# Altium PCB AVR精简学习板_加粗.PCBDOC (part 1 of 2)
Units mm, origin at the board's own origin, x right, y up, seen from the top; angles counter-clockwise.
Board outline 152.4 x 101.6 mm, 2 copper layers (Top Layer, Bottom Layer); 44 components, 51 nets, 211 pads, 1 vias.
Unrouted connection lines stored in the file: 1.
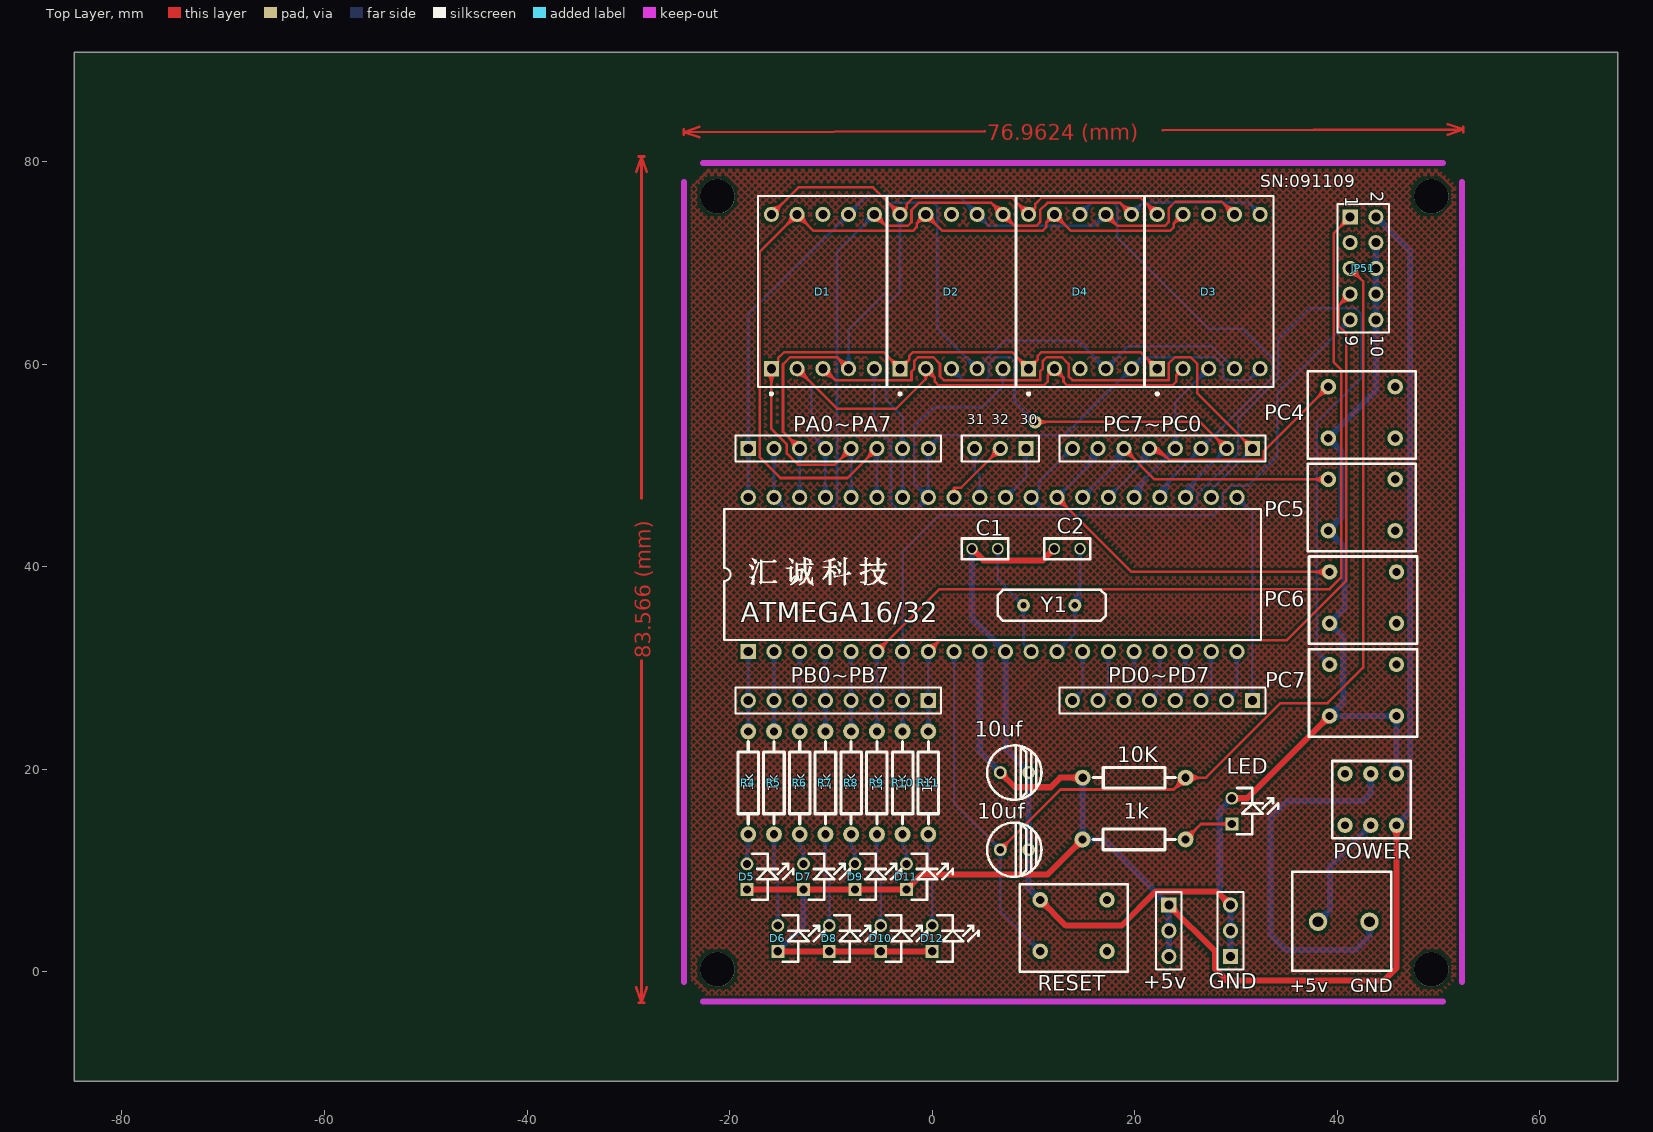
[diagram p0: Top Layer view]
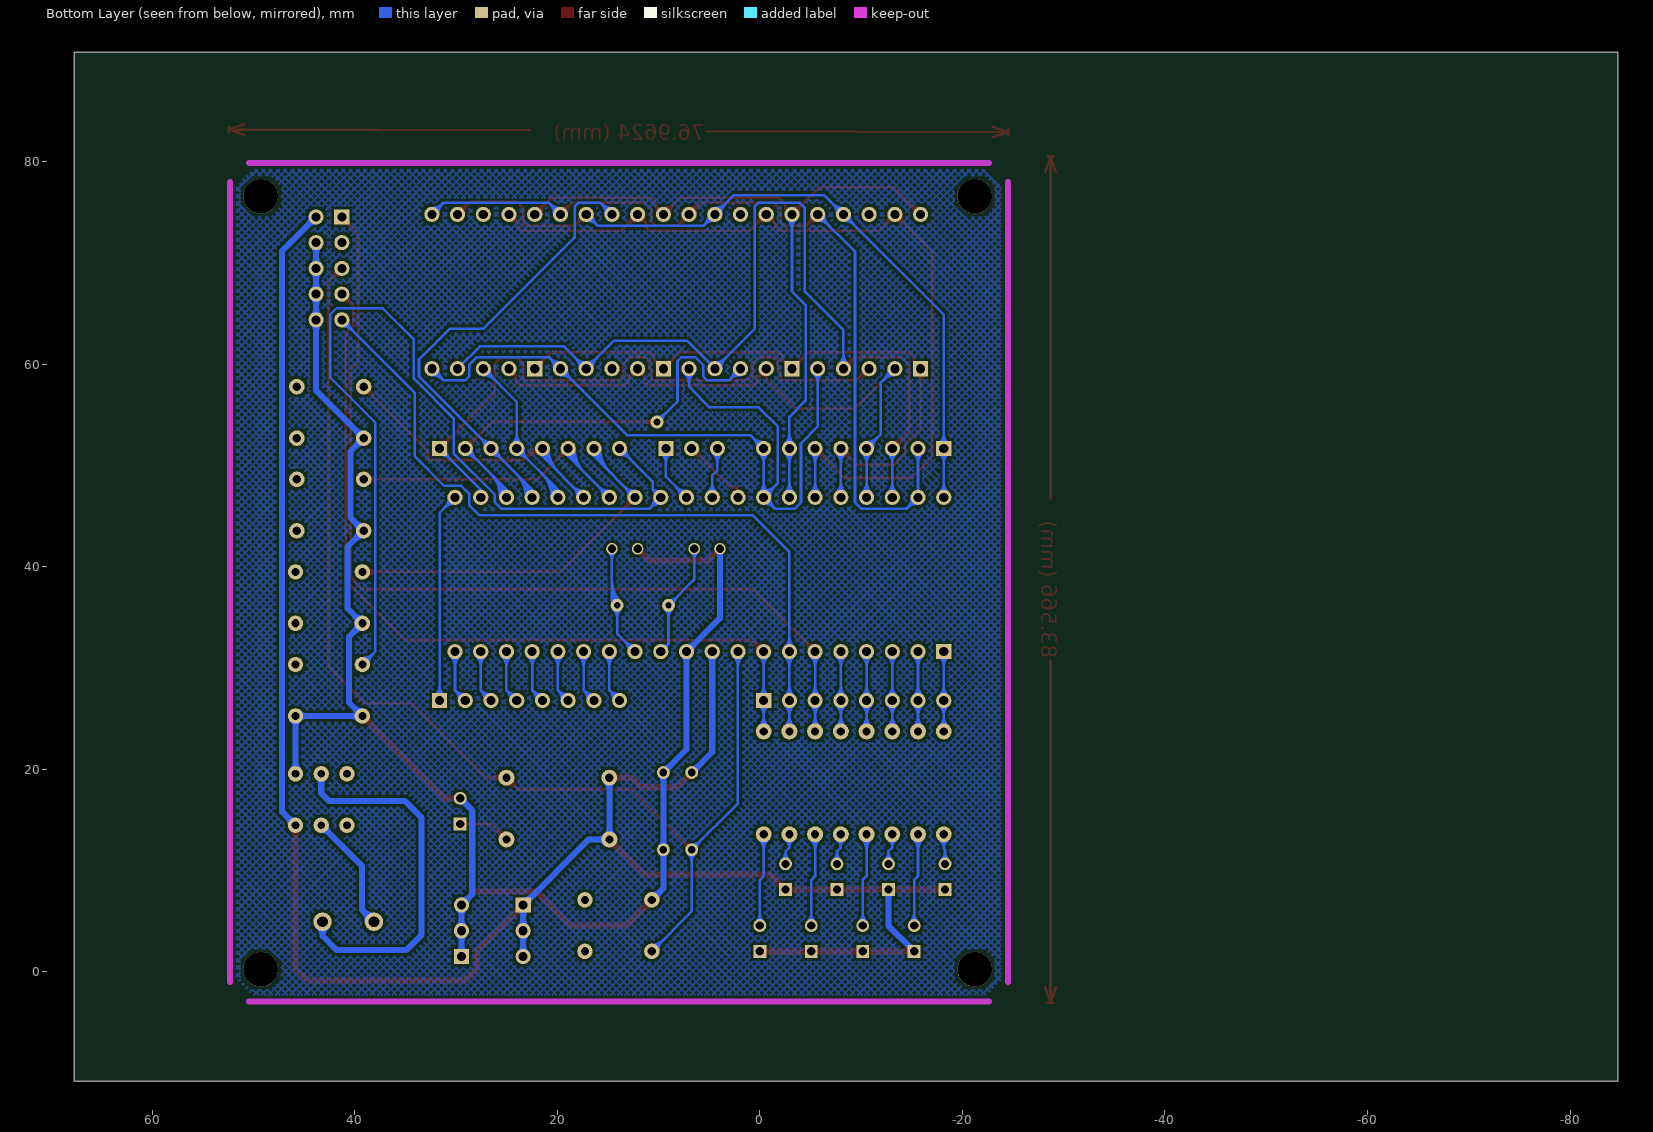
[diagram p1: Bottom Layer view, seen from below]

## Layer stack, top to bottom
Top Layer: signal copper 0.0356
Dielectric: dielectric 0.32, FR-4, Dk 4.8
Bottom Layer: signal copper 0.0356

## Board outline
-84.709,-10.795 67.691,-10.795 67.691,90.805 -84.709,90.805

## Design rules (kind name [scope] priority, off if disabled: settings)
Clearance [All] p1: gap=0.254
ComponentClearance [All] p1: gap=0.254 collisioncheckmode=0 verticalgap=0.254
PolygonConnect [All] p1: connectstyle=Relief reliefconductorwidth=0.254 reliefentries=4 polygonreliefangle="90 Angle"
RoutingVias [All] p1: holewidth=0.711 width=1.27 viastyle="Through Hole" minholewidth=0.711 minwidth=1.27 maxholewidth=0.711 maxwidth=1.27
SolderMaskExpansion [All] p1: expansion=0.102
TestPointUsage [All] p1: valid=0 allowmultiple=FALSE
Testpoint [All] p1: side=15 testpointundercomponent=TRUE minsize=1.016 maxsize=2.54 preferedsize=1.524 minholesize=0 maxholesize=1.016 preferedholesize=0.813 testpointgrid=0.025 style=1023 order=0-112345678
Width Width_3 [InNet('Net11_1')] p1: maxlimit=0.6 minlimit=0.6 preferedwidth=0.6
Width Width_2 [InNet('VCC')] p2: maxlimit=0.6 minlimit=0.6 preferedwidth=0.6
Width Width_1 [InNet('GND')] p3: maxlimit=0.6 minlimit=0.6 preferedwidth=0.6
Width [All] p4: maxlimit=0.254 minlimit=0.254 preferedwidth=0.254
17 further rules are at their usual default settings.

## Classes and differential pairs
component class shumaguan: 10uf 10Uf C1 C2 D1 D2 D3 D4 D5 D6 D7 D8 D9 D10 D11 D12 PC4 PC6 PC7 POWER RESET

## Components (designator, comment, footprint, x,y, rotation, side; value= is the part's Value field where it differs from the comment)
1k "470" AXIAL0.4 14.859,13.081 r0 top (schematic designator R1)
10K "8.2k" AXIAL0.4 25.019,19.177 r180 top (schematic designator R3)
10uf "360u\15v" cap2 2.159,19.685 r0 top (schematic designator C7)
10uf "1uf" cap2 2.159,12.065 r0 top (schematic designator C?)
+5v "VCC" HDR1X3 23.368,6.604 r270 top (schematic designator JP11)
ATMEGA16/32 "ATmega16-16PC" 40P6 5.969,39.243 r0 top (schematic designator U1)
C1 "15p" RAD0.3 6.985,41.783 r180 top
C2 "15p" RAD0.3 11.557,41.783 r0 top
D1 "3" LEDDIP-10/C15.24 -10.795,67.183 r0 top
D2 "Dpy Blue-CC" LEDDIP-10/C15.24 1.905,67.183 r0 top
D3 "Dpy Blue-CC" LEDDIP-10/C15.24 27.305,67.183 r0 top
D4 "Dpy Blue-CC" LEDDIP-10/C15.24 14.605,67.183 r0 top
D5 "LED" LED -17.78,10.16 r270 top
D6 "LED" LED -14.732,4.064 r270 top
D7 "LED" LED -12.192,10.16 r270 top
D8 "LED" LED -9.652,4.064 r270 top
D9 "LED" LED -7.112,10.16 r270 top
D10 "LED" LED -4.572,4.064 r270 top
D11 "LED" LED -2.032,10.16 r270 top
D12 "LED" LED 0.508,4.064 r270 top
GND "GND" HDR1X3 29.464,1.524 r90 top (schematic designator JP12)
JP1 "Header 3" HDR1X3 9.271,51.689 r180 top
JP51 "download" HDR2X5 41.275,74.549 r270 top
LED "LED" LED 30.099,16.637 r270 top
PA0~PA7 "Header 8" HDR1X8 -18.161,51.689 r0 top (schematic designator JP5)
PB0~PB7 "Header 8" HDR1X8 -0.381,26.797 r180 top (schematic designator JP2)
PC4 "KEY" KEY-1 39.116,57.785 r0 top (schematic designator 1)
PC5 "2" KEY-1 39.116,48.641 r0 top (schematic designator 2)
PC6 "KEY" KEY-1 39.243,39.497 r0 top (schematic designator 3)
PC7 "KEY" KEY-1 39.243,30.353 r0 top (schematic designator 4)
PC7~PC0 "Header 8" HDR1X8 31.623,51.689 r180 top (schematic designator JP6)
PD0~PD7 "Header 8" HDR1X8 31.623,26.797 r180 top (schematic designator JP3)
POWER "power" PCBComponent_1 42.672,5.588 r0 top (schematic designator 11)
R4 "470" AXIAL0.4 -18.161,13.589 r90 top
R5 "8.2k" AXIAL0.4 -15.621,13.589 r90 top
R6 "8.2k" AXIAL0.4 -13.081,13.589 r90 top
R7 "8.2k" AXIAL0.4 -10.541,13.589 r90 top
R8 "8.2k" AXIAL0.4 -8.001,13.589 r90 top
R9 "8.2k" AXIAL0.4 -5.461,13.589 r90 top
R10 "8.2k" AXIAL0.4 -2.921,13.589 r90 top
R11 "8.2k" AXIAL0.4 -0.381,13.589 r90 top
RESET "KEY" KEY-1 10.668,7.112 r0 top (schematic designator 5)
RT "KEY-33" key 43.307,20.193 r90 top
Y1 "12M" CRYSTAL 11.557,35.179 r180 top

## Footprints (in the part's own frame and the unit in brackets; to place one, negate y for a bottom-side part, rotate by r counter-clockwise, add the part's x,y. Pads: shape width x height; smd on the part's side, far side on the other; paste and mask are expansions set on the pad)
40P6 [mm] "DIP; 40 Leads; Row Spacing 15.24 mm; Pitch 2.54 mm"
  rect 1.5x1.5 hole 0.9: 1(-24.13,-7.62)
  round 1.5 hole 0.9: 2(-21.59,-7.62) 3(-19.05,-7.62) 4(-16.51,-7.62) 5(-13.97,-7.62) 6(-11.43,-7.62) 7(-8.89,-7.62) 8(-6.35,-7.62) 9(-3.81,-7.62) 10(-1.27,-7.62) 11(1.27,-7.62) 12(3.81,-7.62) 13(6.35,-7.62) 14(8.89,-7.62) 15(11.43,-7.62) 16(13.97,-7.62) 17(16.51,-7.62) 18(19.05,-7.62) 19(21.59,-7.62) 20(24.13,-7.62) 21(24.13,7.62) 22(21.59,7.62) 23(19.05,7.62) 24(16.51,7.62) 25(13.97,7.62) 26(11.43,7.62) 27(8.89,7.62) 28(6.35,7.62) 29(3.81,7.62) 30(1.27,7.62) 31(-1.27,7.62) 32(-3.81,7.62) 33(-6.35,7.62) 34(-8.89,7.62) 35(-11.43,7.62) 36(-13.97,7.62) 37(-16.51,7.62) 38(-19.05,7.62) 39(-21.59,7.62) 40(-24.13,7.62)
  silkscreen extent -26.5,-6.45 26.5,6.45
AXIAL0.4 [mil]
  round 62 hole 32: 1(-0.15,-0.04) 2(399.85,-0.04)
  silkscreen extent 40,-40 360,40
cap2 [mil]
  round 50 hole 30: 1(180,0) 2(290,0)
  silkscreen extent 129,-106 340,106
CRYSTAL [mil] "CRYSTAL"
  round 50 hole 25: 1(-100,-40) 2(100,-40)
  silkscreen extent -220,-100 200,20
HDR1X3 [mm] "Connector; Header; 3 Position"
  rect 1.5x1.5 hole 0.9: 1(0,0)
  round 1.5 hole 0.9: 2(2.54,0) 3(5.08,0)
  silkscreen extent -1.27,-1.27 6.35,1.27
HDR1X8 [mm] "Connector; Header; 8 Position"
  rect 1.5x1.5 hole 0.9: 1(0,0)
  round 1.5 hole 0.9: 2(2.54,0) 3(5.08,0) 4(7.62,0) 5(10.16,0) 6(12.7,0) 7(15.24,0) 8(17.78,0)
  silkscreen extent -1.27,-1.27 19.05,1.27
HDR2X5 [mm] "Connector; Header; 5x2 Position"
  rect 1.5x1.5 hole 0.9: 1(0,0)
  round 1.5 hole 0.9: 2(0,2.54) 3(2.54,0) 4(2.54,2.54) 5(5.08,0) 6(5.08,2.54) 7(7.62,0) 8(7.62,2.54) 9(10.16,0) 10(10.16,2.54)
  silkscreen extent -1.27,-1.27 11.43,3.81
key [mil]
  round 60 hole 30: 0(-225,100) 1(-225,0) 2(-225,-100) 3(-25,-100) 4(-25,0) 5(-25,100)
  silkscreen extent -275,-155 25,150
KEY-1 [mil] "KEY"
  round 60 hole 32: 0(0,0) 1(260,0) 2(0,-200) 3(260,-200)
  silkscreen extent -80,-280 340,60
LED [mil]
  rect 50x50 hole 32: 1(80,-20)
  round 50 hole 32: 2(-20,-20)
  silkscreen extent -60,0 120,160
LEDDIP-10/C15.24 [mm]
  rect 1.5x1.5 hole 0.9: 1(-5.08,-7.62)
  round 1.5 hole 0.9: 2(-2.54,-7.62) 3(0,-7.62) 4(2.54,-7.62) 5(5.08,-7.62) 6(5.08,7.62) 7(2.54,7.62) 8(0,7.62) 9(-2.54,7.62) 10(-5.08,7.62)
  silkscreen extent -6.4,-10.22 6.4,9.45
PCBComponent_1 [mil]
  round 71.81 hole 41.81: 1(-180,-25) 2(20,-25)
  silkscreen extent -280,-215 105,170
RAD0.3 [mil]
  round 45 hole 32: 1(20,0) 2(120,0)
  silkscreen extent -20,-40 160,40

## Part data
1k 10K R4 R5 R6 R7 R8 R9 R10 R11: library part RES2
10uf 10uf: library part "CAPACITOR POL", "Capacitor"
+5v GND: library part "Header 3", "Header, 3-Pin"
ATMEGA16/32: "8-Bit AVR Microcontroller with 16K Bytes of In-System Programmable Flash Memory"
C1 C2: library part CAP, "Capacitor"
D1: library part "Dpy Blue-CC", "14.2 mm General Purpose Blue 7-Segment Display: CC, RH DP, Gray Surface"
D2 D3 D4: "14.2 mm General Purpose Blue 7-Segment Display: CC, RH DP, Gray Surface"
JP1: "Header, 3-Pin"
JP51: library part "Header 5X2", "Header, 5-Pin, Dual row"
PA0~PA7 PB0~PB7 PC7~PC0 PD0~PD7: "Header, 8-Pin"
PC5: library part KEY, "KEY"
Y1: library part CRYSTAL, "Crystal"

## Free pads (board coordinates)
  round 3.4 hole 3.4: 0(-21.209,0.254) 0(-21.209,76.581) 0(49.276,0.254) 0(49.276,76.581)

## Via types
v1: diameter 1.27, hole 0.711, Top Layer to Bottom Layer, 1 vias

## Nets (pads, with @x,y where several pads share a name; then routed paths per layer and width w, separated by ;. In a path a pad name is that pad's centre, name@x,y a point inside that pad or via, vN(x,y) a via of type N, cw(c..) or ccw(c..) an arc to the next point about the centre after c; other vN are vias at no path point)
D0: ATMEGA16/32.40 D1.7 D2.7 D3.7 D4.7 PA0~PA7.1 | length 113.1
  Top Layer w0.254: D4.7@17.145,74.18 cw(c17.145,72.676) 18.209,73.739 cw(c19.272,74.803) D4.7@17.768,74.803 ; D4.7@17.145,74.434 cw(c17.145,73.543) 17.775,74.173 cw(c18.405,74.803) D4.7@17.514,74.803 ; D4.7@17.145,74.803 18.276,73.672 22.987,73.672 23.356,74.041 23.356,75.401 24.003,76.048 28.6,76.048 D3.7@29.845,74.803 ; D3.7@29.222,74.803 ccw(c27.718,74.803) 28.781,75.867 ccw(c29.845,76.93) D3.7@29.845,75.426 ; D3.7@29.476,74.803 ccw(c28.585,74.803) 29.215,75.433 ccw(c29.845,76.063) D3.7@29.845,75.172
  Bottom Layer w0.254: ATMEGA16/32.40@-18.602,47.304 ccw(c-19.665,48.367) -18.161,48.367 ccw(c-16.657,48.367) ATMEGA16/32.40@-17.72,47.304 ; PA0~PA7.1@-18.602,51.248 cw(c-19.665,50.185) -18.161,50.185 cw(c-16.657,50.185) PA0~PA7.1@-17.72,51.248 ; PA0~PA7.1@-18.602,52.13 ccw(c-19.665,53.193) -18.161,53.193 ccw(c-16.657,53.193) PA0~PA7.1@-17.72,52.13 ; ATMEGA16/32.40@-18.422,47.124 ccw(c-19.052,47.754) -18.161,47.754 ccw(c-17.27,47.754) ATMEGA16/32.40@-17.9,47.124 ; PA0~PA7.1@-18.422,51.428 cw(c-19.052,50.798) -18.161,50.798 cw(c-17.27,50.798) PA0~PA7.1@-17.9,51.428 ; PA0~PA7.1@-18.422,51.95 ccw(c-19.052,52.58) -18.161,52.58 ccw(c-17.27,52.58) PA0~PA7.1@-17.9,51.95 ; ATMEGA16/32.40@-18.161,46.863 PA0~PA7.1@-18.161,51.689 -18.161,64.897 D1.7@-8.255,74.803 -6.35,76.708 2.54,76.708 D2.7@4.445,74.803 5.588,73.66 16.002,73.66 D4.7@17.145,74.803 ; D1.7@-8.878,74.803 cw(c-10.382,74.803) -9.319,73.739 cw(c-8.255,72.676) D1.7@-8.255,74.18 ; D1.7@-8.624,74.803 cw(c-9.515,74.803) -8.885,74.173 cw(c-8.255,73.543) D1.7@-8.255,74.434 ; D1.7@-8.255,75.172 ccw(c-8.255,76.063) -7.625,75.433 ccw(c-6.995,74.803) D1.7@-7.886,74.803 ; D1.7@-8.255,75.426 ccw(c-8.255,76.93) -7.191,75.867 ccw(c-6.128,74.803) D1.7@-7.632,74.803 ; D2.7@3.822,74.803 ccw(c2.318,74.803) 3.381,75.867 ccw(c4.445,76.93) D2.7@4.445,75.426 ; D2.7@4.076,74.803 ccw(c3.185,74.803) 3.815,75.433 ccw(c4.445,76.063) D2.7@4.445,75.172 ; D2.7@4.445,74.18 cw(c4.445,72.676) 5.509,73.739 cw(c6.572,74.803) D2.7@5.068,74.803 ; D2.7@4.445,74.434 cw(c4.445,73.543) 5.075,74.173 cw(c5.705,74.803) D2.7@4.814,74.803 ; D4.7@16.522,74.803 cw(c15.018,74.803) 16.081,73.739 cw(c17.145,72.676) D4.7@17.145,74.18 ; D4.7@16.776,74.803 cw(c15.885,74.803) 16.515,74.173 cw(c17.145,73.543) D4.7@17.145,74.434
D1: ATMEGA16/32.39 D1.6 D2.6 D3.6 D4.6 PA0~PA7.2 | length 119.8
  Top Layer w0.254: D1.6@-5.715,74.18 cw(c-5.715,72.676) -4.651,73.739 cw(c-3.588,74.803) D1.6@-5.092,74.803 ; D1.6@-5.715,74.434 cw(c-5.715,73.543) -5.085,74.173 cw(c-4.455,74.803) D1.6@-5.346,74.803 ; D1.6@-5.715,74.803 -4.584,73.672 -2.413,73.672 -2.044,74.041 -2.044,75.223 -1.333,75.934 5.854,75.934 D2.6@6.985,74.803 8.116,73.672 10.299,73.672 10.668,74.041 10.668,75.235 11.367,75.934 18.554,75.934 D4.6@19.685,74.803 ; D2.6@6.362,74.803 ccw(c4.858,74.803) 5.921,75.867 ccw(c6.985,76.93) D2.6@6.985,75.426 ; D2.6@6.616,74.803 ccw(c5.725,74.803) 6.355,75.433 ccw(c6.985,76.063) D2.6@6.985,75.172 ; D2.6@6.985,74.18 cw(c6.985,72.676) 8.049,73.739 cw(c9.112,74.803) D2.6@7.608,74.803 ; D2.6@6.985,74.434 cw(c6.985,73.543) 7.615,74.173 cw(c8.245,74.803) D2.6@7.354,74.803 ; D4.6@19.062,74.803 ccw(c17.558,74.803) 18.621,75.867 ccw(c19.685,76.93) D4.6@19.685,75.426 ; D4.6@19.316,74.803 ccw(c18.425,74.803) 19.055,75.433 ccw(c19.685,76.063) D4.6@19.685,75.172
  Bottom Layer w0.254: PA0~PA7.2@-16.062,51.248 cw(c-17.125,50.185) -15.621,50.185 cw(c-14.117,50.185) PA0~PA7.2@-15.18,51.248 ; PA0~PA7.2@-15.882,51.428 cw(c-16.512,50.798) -15.621,50.798 cw(c-14.73,50.798) PA0~PA7.2@-15.36,51.428 ; ATMEGA16/32.39@-15.621,46.24 cw(c-15.621,44.736) -14.557,45.799 cw(c-13.494,46.863) ATMEGA16/32.39@-14.998,46.863 ; ATMEGA16/32.39@-15.621,46.494 cw(c-15.621,45.603) -14.991,46.233 cw(c-14.361,46.863) ATMEGA16/32.39@-15.252,46.863 ; PA0~PA7.2@-15.621,51.689 ATMEGA16/32.39@-15.621,46.863 -14.478,45.72 -10.033,45.72 -9.398,46.355 -9.398,71.12 D1.6@-5.715,74.803 ; D1.6@-6.338,74.803 cw(c-7.842,74.803) -6.779,73.739 cw(c-5.715,72.676) D1.6@-5.715,74.18 ; D1.6@-6.084,74.803 cw(c-6.975,74.803) -6.345,74.173 cw(c-5.715,73.543) D1.6@-5.715,74.434 ; D4.6@19.685,74.803 20.828,75.946 31.242,75.946 D3.6@32.385,74.803 ; D4.6@19.685,75.172 ccw(c19.685,76.063) 20.315,75.433 ccw(c20.945,74.803) D4.6@20.054,74.803 ; D4.6@19.685,75.426 ccw(c19.685,76.93) 20.749,75.867 ccw(c21.812,74.803) D4.6@20.308,74.803 ; D3.6@31.762,74.803 ccw(c30.258,74.803) 31.321,75.867 ccw(c32.385,76.93) D3.6@32.385,75.426 ; D3.6@32.016,74.803 ccw(c31.125,74.803) 31.755,75.433 ccw(c32.385,76.063) D3.6@32.385,75.172
D2: ATMEGA16/32.38 D1.4 D2.4 D3.4 D4.4 PA0~PA7.3 | length 121.1
  Top Layer w0.254: PA0~PA7.3@-13.704,51.689 ccw(c-15.208,51.689) -14.145,52.753 ccw(c-13.081,53.816) PA0~PA7.3@-13.081,52.312 ; PA0~PA7.3@-13.45,51.689 ccw(c-14.341,51.689) -13.711,52.319 ccw(c-13.081,52.949) PA0~PA7.3@-13.081,52.058 ; PA0~PA7.3@-13.081,51.689 -14.732,53.34 -14.732,59.995 -14.033,60.694 -9.386,60.694 D1.4@-8.255,59.563 ; D1.4@-8.878,59.563 ccw(c-10.382,59.563) -9.319,60.627 ccw(c-8.255,61.69) D1.4@-8.255,60.186 ; D1.4@-8.624,59.563 ccw(c-9.515,59.563) -8.885,60.193 ccw(c-8.255,60.823) D1.4@-8.255,59.932
  Bottom Layer w0.254: ATMEGA16/32.38@-13.522,47.304 ccw(c-14.585,48.367) -13.081,48.367 ccw(c-11.577,48.367) ATMEGA16/32.38@-12.64,47.304 ; PA0~PA7.3@-13.522,51.248 cw(c-14.585,50.185) -13.081,50.185 cw(c-11.577,50.185) PA0~PA7.3@-12.64,51.248 ; ATMEGA16/32.38@-13.342,47.124 ccw(c-13.972,47.754) -13.081,47.754 ccw(c-12.19,47.754) ATMEGA16/32.38@-12.82,47.124 ; PA0~PA7.3@-13.342,51.428 cw(c-13.972,50.798) -13.081,50.798 cw(c-12.19,50.798) PA0~PA7.3@-12.82,51.428 ; ATMEGA16/32.38@-13.081,46.863 PA0~PA7.3@-13.081,51.689 ; D1.4@-8.696,60.004 ccw(c-9.759,61.067) -8.255,61.067 ccw(c-6.751,61.067) D1.4@-7.814,60.004 ; D1.4@-8.516,59.824 ccw(c-9.146,60.454) -8.255,60.454 ccw(c-7.364,60.454) D1.4@-7.994,59.824 ; D1.4@-8.255,59.563 -8.255,63.373 -4.445,67.183 -4.445,75.438 -3.937,75.946 0.127,75.946 0.508,75.565 0.508,63.5 D2.4@4.445,59.563 7.214,62.332 14.376,62.332 D4.4@17.145,59.563 19.355,61.773 27.635,61.773 D3.4@29.845,59.563 ; D2.4@3.822,59.563 ccw(c2.318,59.563) 3.381,60.627 ccw(c4.445,61.69) D2.4@4.445,60.186 ; D2.4@4.076,59.563 ccw(c3.185,59.563) 3.815,60.193 ccw(c4.445,60.823) D2.4@4.445,59.932 ; D4.4@16.522,59.563 ccw(c15.018,59.563) 16.081,60.627 ccw(c17.145,61.69) 17.145,60.186 ccw(c17.145,61.69) 18.209,60.627 ccw(c19.272,59.563) D4.4@17.768,59.563 ; D4.4@16.776,59.563 ccw(c15.885,59.563) 16.515,60.193 ccw(c17.145,60.823) 17.145,59.932 ccw(c17.145,60.823) 17.775,60.193 ccw(c18.405,59.563) D4.4@17.514,59.563
D3: ATMEGA16/32.37 D1.2 D2.2 D3.2 D4.2 PA0~PA7.4 | length 87.3
  Top Layer w0.254: D1.2@-13.335,58.94 cw(c-13.335,57.436) -12.271,58.499 cw(c-11.208,59.563) D1.2@-12.712,59.563 ; D1.2@-13.335,59.194 cw(c-13.335,58.303) -12.705,58.933 cw(c-12.075,59.563) D1.2@-12.966,59.563 ; D1.2@-13.335,59.563 -9.398,55.626 -3.548,55.626 -0.635,58.539 ; D2.2@-0.921,59.01 cw(c-1.164,58.539) -0.635,58.539 ; D2.2@-0.589,59.197 cw(c-0.517,58.614) -0.101,59.029 cw(c0.314,59.445) D2.2@-0.269,59.517 ; D2.2@-0.558,58.945 cw(c-0.435,57.961) 0.266,58.662 ; D2.2@-0.349,59.01 ccw(c-0.106,58.539) -0.635,58.539 ; D2.2@-0.017,59.486 ccw(c0.967,59.363) 0.266,58.662 ; D4.2@11.487,59.331 cw(c11.112,59.181) 11.398,58.896 cw(c11.683,58.61) D4.2@11.833,58.985 ; D4.2@12.111,59.197 cw(c12.183,58.614) 12.599,59.029 cw(c13.014,59.445) D4.2@12.431,59.517 ; D4.2@12.142,58.945 cw(c12.265,57.961) 12.966,58.662 ; D4.2@12.683,59.486 ccw(c13.667,59.363) 12.966,58.662 ; D3.2@24.187,59.331 cw(c23.812,59.181) 24.098,58.896 cw(c24.383,58.61) D3.2@24.533,58.985 ; D3.2@24.765,59.563 24.098,58.896 24.098,58.273 23.749,57.924 13.335,57.924 12.966,58.293 12.966,58.662 ; -0.635,58.539 D2.2@-0.635,59.563 0.266,58.662 ; 0.266,58.662 0.266,58.293 0.635,57.924 11.049,57.924 11.398,58.273 11.398,58.896 D4.2@12.065,59.563 12.966,58.662
  Bottom Layer w0.254: D1.2@-13.335,58.94 cw(c-13.335,57.436) -12.271,58.499 cw(c-11.208,59.563) D1.2@-12.712,59.563 ; D1.2@-13.335,59.194 cw(c-13.335,58.303) -12.705,58.933 cw(c-12.075,59.563) D1.2@-12.966,59.563 ; D1.2@-13.335,59.563 -11.938,58.166 -11.938,53.086 PA0~PA7.4@-10.541,51.689 ATMEGA16/32.37@-10.541,46.863 ; PA0~PA7.4@-11.164,51.689 ccw(c-12.668,51.689) -11.605,52.753 ccw(c-10.541,53.816) PA0~PA7.4@-10.541,52.312 ; ATMEGA16/32.37@-10.982,47.304 ccw(c-12.045,48.367) -10.541,48.367 ccw(c-9.037,48.367) ATMEGA16/32.37@-10.1,47.304 ; PA0~PA7.4@-10.982,51.248 cw(c-12.045,50.185) -10.541,50.185 cw(c-9.037,50.185) PA0~PA7.4@-10.1,51.248 ; PA0~PA7.4@-10.91,51.689 ccw(c-11.801,51.689) -11.171,52.319 ccw(c-10.541,52.949) PA0~PA7.4@-10.541,52.058 ; ATMEGA16/32.37@-10.802,47.124 ccw(c-11.432,47.754) -10.541,47.754 ccw(c-9.65,47.754) ATMEGA16/32.37@-10.28,47.124 ; PA0~PA7.4@-10.802,51.428 cw(c-11.432,50.798) -10.541,50.798 cw(c-9.65,50.798) PA0~PA7.4@-10.28,51.428
D4: ATMEGA16/32.36 D1.1 D2.1 D3.1 D4.1 PA0~PA7.5 | length 97.1
  Top Layer w0.254: D1.1@-16.316,59.122 cw(c-17.379,58.059) -15.875,58.059 cw(c-14.371,58.059) D1.1@-15.434,59.122 ; D1.1@-16.136,59.302 cw(c-16.766,58.672) -15.875,58.672 cw(c-14.984,58.672) D1.1@-15.614,59.302 ; D1.1@-15.643,60.141 ccw(c-15.493,60.516) -15.208,60.23 ccw(c-14.922,59.945) D1.1@-15.297,59.795 ; PA0~PA7.5@-8.624,51.689 cw(c-10.128,51.689) -9.065,50.625 cw(c-8.001,49.562) PA0~PA7.5@-8.001,51.066 ; PA0~PA7.5@-8.37,51.689 cw(c-9.261,51.689) -8.631,51.059 cw(c-8.001,50.429) PA0~PA7.5@-8.001,51.32 ; PA0~PA7.5@-8.001,51.689 -9.601,50.089 -13.259,50.089 -14.351,51.181 -14.351,52.095 -15.875,53.619 D1.1@-15.875,59.563 -15.208,60.23 -15.208,60.599 -14.605,61.202 -4.814,61.202 D2.1@-3.175,59.563 -2.274,60.464 ; D2.1@-3.798,59.563 ccw(c-5.302,59.563) -4.239,60.627 ccw(c-3.175,61.69) D2.1@-3.175,60.186 ; D2.1@-3.544,59.563 ccw(c-4.435,59.563) -3.805,60.193 ccw(c-3.175,60.823) D2.1@-3.175,59.932 ; D2.1@-3.129,59.929 ccw(c-3.057,60.512) -2.641,60.097 ccw(c-2.226,59.681) D2.1@-2.809,59.609 ; D2.1@-3.098,60.181 ccw(c-2.975,61.165) -2.274,60.464 ; D2.1@-2.557,59.64 cw(c-1.573,59.763) -2.274,60.464 ; D4.1@8.902,59.563 ccw(c7.398,59.563) 8.461,60.627 ccw(c9.525,61.69) D4.1@9.525,60.186 ; D4.1@9.156,59.563 ccw(c8.265,59.563) 8.895,60.193 ccw(c9.525,60.823) D4.1@9.525,59.932 ; D4.1@9.571,59.929 ccw(c9.643,60.512) 10.059,60.097 ccw(c10.474,59.681) D4.1@9.891,59.609 ; D4.1@9.602,60.181 ccw(c9.725,61.165) 10.426,60.464 ; D4.1@10.143,59.64 cw(c11.127,59.763) 10.426,60.464 ; D3.1@21.602,59.563 ccw(c20.098,59.563) 21.161,60.627 ccw(c22.225,61.69) D3.1@22.225,60.186 ; D3.1@21.856,59.563 ccw(c20.965,59.563) 21.595,60.193 ccw(c22.225,60.823) D3.1@22.225,59.932 ; D3.1@22.225,59.563 20.586,61.202 10.795,61.202 10.426,60.833 10.426,60.464 ; -2.274,60.464 -2.274,60.833 -1.905,61.202 7.886,61.202 D4.1@9.525,59.563 10.426,60.464
  Bottom Layer w0.254: ATMEGA16/32.36@-8.442,47.304 ccw(c-9.505,48.367) -8.001,48.367 ccw(c-6.497,48.367) ATMEGA16/32.36@-7.56,47.304 ; PA0~PA7.5@-8.442,51.248 cw(c-9.505,50.185) -8.001,50.185 cw(c-6.497,50.185) PA0~PA7.5@-7.56,51.248 ; ATMEGA16/32.36@-8.262,47.124 ccw(c-8.892,47.754) -8.001,47.754 ccw(c-7.11,47.754) ATMEGA16/32.36@-7.74,47.124 ; PA0~PA7.5@-8.262,51.428 cw(c-8.892,50.798) -8.001,50.798 cw(c-7.11,50.798) PA0~PA7.5@-7.74,51.428 ; ATMEGA16/32.36@-8.001,46.863 PA0~PA7.5@-8.001,51.689
D5: ATMEGA16/32.35 D1.9 D2.9 D3.9 D4.9 PA0~PA7.6 | length 120.4
  Top Layer w0.254: D1.9@-13.958,74.803 cw(c-15.462,74.803) -14.399,73.739 cw(c-13.335,72.676) -13.335,74.18 cw(c-13.335,72.676) -12.271,73.739 cw(c-11.208,74.803) D1.9@-12.712,74.803 ; D1.9@-13.704,74.803 cw(c-14.595,74.803) -13.965,74.173 cw(c-13.335,73.543) -13.335,74.434 cw(c-13.335,73.543) -12.705,74.173 cw(c-12.075,74.803) D1.9@-12.966,74.803 ; PA0~PA7.6@-6.084,51.689 cw(c-7.588,51.689) -6.525,50.625 cw(c-5.461,49.562) PA0~PA7.6@-5.461,51.066 ; PA0~PA7.6@-5.83,51.689 cw(c-6.721,51.689) -6.091,51.059 cw(c-5.461,50.429) PA0~PA7.6@-5.461,51.32 ; PA0~PA7.6@-5.461,51.689 -8.382,48.768 -14.986,48.768 -17.018,50.8 -17.018,71.12 D1.9@-13.335,74.803 -11.696,73.164 -1.905,73.164 -1.536,73.533 -1.536,73.902 ; D2.9@-1.253,74.726 cw(c-2.237,74.603) -1.536,73.902 ; D2.9@-1.001,74.757 cw(c-1.584,74.685) -1.169,74.269 cw(c-0.753,73.854) D2.9@-0.681,74.437 ; D2.9@-0.712,74.185 ccw(c-0.835,73.201) -1.536,73.902 ; D2.9@-0.635,74.18 cw(c-0.635,72.676) 0.429,73.739 cw(c1.492,74.803) D2.9@-0.012,74.803 ; D2.9@-0.635,74.434 cw(c-0.635,73.543) -0.005,74.173 cw(c0.625,74.803) D2.9@-0.266,74.803 ; D4.9@11.457,74.667 cw(c10.755,74.51) 11.264,74.002 ; D4.9@11.929,74.195 ccw(c11.772,73.493) 11.264,74.002 ; D4.9@12.065,74.18 cw(c12.065,72.676) 13.129,73.739 cw(c14.192,74.803) D4.9@12.688,74.803 ; D4.9@12.065,74.434 cw(c12.065,73.543) 12.695,74.173 cw(c13.325,74.803) D4.9@12.434,74.803 ; D3.9@24.147,74.726 cw(c23.163,74.603) 23.864,73.902 ; D3.9@24.399,74.757 cw(c23.816,74.685) 24.231,74.269 cw(c24.647,73.854) D3.9@24.719,74.437 ; D3.9@24.688,74.185 ccw(c24.565,73.201) 23.864,73.902 ; D3.9@24.765,74.803 23.864,73.902 ; -1.536,73.902 D2.9@-0.635,74.803 1.004,73.164 10.894,73.164 11.263,73.533 11.263,74.001 ; 11.263,74.001 D4.9@12.065,74.803 13.704,73.164 23.495,73.164 23.864,73.533 23.864,73.902
  Bottom Layer w0.254: ATMEGA16/32.35@-5.902,47.304 ccw(c-6.965,48.367) -5.461,48.367 ccw(c-3.957,48.367) ATMEGA16/32.35@-5.02,47.304 ; PA0~PA7.6@-5.902,51.248 cw(c-6.965,50.185) -5.461,50.185 cw(c-3.957,50.185) PA0~PA7.6@-5.02,51.248 ; ATMEGA16/32.35@-5.722,47.124 ccw(c-6.352,47.754) -5.461,47.754 ccw(c-4.57,47.754) ATMEGA16/32.35@-5.2,47.124 ; PA0~PA7.6@-5.722,51.428 cw(c-6.352,50.798) -5.461,50.798 cw(c-4.57,50.798) PA0~PA7.6@-5.2,51.428 ; ATMEGA16/32.35@-5.461,46.863 PA0~PA7.6@-5.461,51.689
D6: ATMEGA16/32.34 D1.10 D2.10 D3.10 D4.10 PA0~PA7.7 | length 104.6
  Top Layer w0.254: D1.10@-15.875,74.803 -13.208,77.47 -5.842,77.47 D2.10@-3.175,74.803 -2.508,75.47 -2.508,75.839 -1.905,76.442 7.886,76.442 D4.10@9.525,74.803 10.192,75.47 10.192,75.839 10.795,76.442 20.586,76.442 D3.10@22.225,74.803 ; D1.10@-15.875,75.172 ccw(c-15.875,76.063) -15.245,75.433 ccw(c-14.615,74.803) D1.10@-15.506,74.803 ; D1.10@-15.875,75.426 ccw(c-15.875,76.93) -14.811,75.867 ccw(c-13.748,74.803) D1.10@-15.252,74.803 ; D2.10@-3.798,74.803 ccw(c-5.302,74.803) -4.239,75.867 ccw(c-3.175,76.93) D2.10@-3.175,75.426 ; D2.10@-3.544,74.803 ccw(c-4.435,74.803) -3.805,75.433 ccw(c-3.175,76.063) D2.10@-3.175,75.172 ; D2.10@-2.943,75.381 ccw(c-2.793,75.756) -2.508,75.47 ccw(c-2.222,75.185) D2.10@-2.597,75.035 ; D4.10@8.902,74.803 ccw(c7.398,74.803) 8.461,75.867 ccw(c9.525,76.93) D4.10@9.525,75.426 ; D4.10@9.156,74.803 ccw(c8.265,74.803) 8.895,75.433 ccw(c9.525,76.063) D4.10@9.525,75.172 ; D4.10@9.757,75.381 ccw(c9.907,75.756) 10.192,75.47 ccw(c10.478,75.185) D4.10@10.103,75.035 ; D3.10@21.602,74.803 ccw(c20.098,74.803) 21.161,75.867 ccw(c22.225,76.93) D3.10@22.225,75.426 ; D3.10@21.856,74.803 ccw(c20.965,74.803) 21.595,75.433 ccw(c22.225,76.063) D3.10@22.225,75.172
  Bottom Layer w0.254: D2.10@-3.616,74.362 cw(c-4.679,73.299) -3.175,73.299 cw(c-1.671,73.299) D2.10@-2.734,74.362 ; D2.10@-3.436,74.542 cw(c-4.066,73.912) -3.175,73.912 cw(c-2.284,73.912) D2.10@-2.914,74.542 ; ATMEGA16/32.34@-3.362,47.304 ccw(c-4.425,48.367) -2.921,48.367 ccw(c-1.417,48.367) ATMEGA16/32.34@-2.48,47.304 ; PA0~PA7.7@-3.362,51.248 cw(c-4.425,50.185) -2.921,50.185 cw(c-1.417,50.185) PA0~PA7.7@-2.48,51.248 ; PA0~PA7.7@-3.362,52.13 ccw(c-4.425,53.193) -2.921,53.193 ccw(c-1.417,53.193) PA0~PA7.7@-2.48,52.13 ; ATMEGA16/32.34@-3.182,47.124 ccw(c-3.812,47.754) -2.921,47.754 ccw(c-2.03,47.754) ATMEGA16/32.34@-2.66,47.124 ; PA0~PA7.7@-3.182,51.428 cw(c-3.812,50.798) -2.921,50.798 cw(c-2.03,50.798) PA0~PA7.7@-2.66,51.428 ; PA0~PA7.7@-3.182,51.95 ccw(c-3.812,52.58) -2.921,52.58 ccw(c-2.03,52.58) PA0~PA7.7@-2.66,51.95 ; D2.10@-3.175,74.803 -3.175,67.183 -4.521,65.837 -4.521,56.413 -2.921,54.813 PA0~PA7.7@-2.921,51.689 ATMEGA16/32.34@-2.921,46.863
D7: ATMEGA16/32.33 D1.5 D2.5 D3.5 D4.5 PA0~PA7.8 | length 119.1
  Bottom Layer w0.254: D1.5@-6.156,59.122 cw(c-7.219,58.059) -5.715,58.059 cw(c-4.211,58.059) D1.5@-5.274,59.122 ; D1.5@-5.976,59.302 cw(c-6.606,58.672) -5.715,58.672 cw(c-4.824,58.672) D1.5@-5.454,59.302 ; D1.5@-5.715,59.563 -5.715,53.848 -4.064,52.197 -4.064,46.355 -3.429,45.72 -1.524,45.72 ATMEGA16/32.33@-0.381,46.863 ; ATMEGA16/32.33@-0.822,47.304 ccw(c-1.885,48.367) -0.381,48.367 ccw(c1.123,48.367) ATMEGA16/32.33@0.06,47.304 ; PA0~PA7.8@-0.822,51.248 cw(c-1.885,50.185) -0.381,50.185 cw(c1.123,50.185) PA0~PA7.8@0.06,51.248 ; ATMEGA16/32.33@-0.642,47.124 ccw(c-1.272,47.754) -0.381,47.754 ccw(c0.51,47.754) ATMEGA16/32.33@-0.12,47.124 ; PA0~PA7.8@-0.642,51.428 cw(c-1.272,50.798) -0.381,50.798 cw(c0.51,50.798) PA0~PA7.8@-0.12,51.428 ; ATMEGA16/32.33@-0.381,46.24 ccw(c-0.381,44.736) -1.445,45.799 ccw(c-2.508,46.863) -1.004,46.863 ccw(c-2.508,46.863) -1.445,47.927 ccw(c-0.381,48.99) ATMEGA16/32.33@-0.381,47.486 ; ATMEGA16/32.33@-0.381,46.494 ccw(c-0.381,45.603) -1.011,46.233 ccw(c-1.641,46.863) -0.75,46.863 ccw(c-1.641,46.863) -1.011,47.493 ccw(c-0.381,48.123) ATMEGA16/32.33@-0.381,47.232 ; PA0~PA7.8@-0.381,52.058 ccw(c-0.381,52.949) 0.249,52.319 ccw(c0.879,51.689) PA0~PA7.8@-0.012,51.689 ; PA0~PA7.8@-0.381,52.312 ccw(c-0.381,53.816) 0.683,52.753 ccw(c1.746,51.689) PA0~PA7.8@0.242,51.689 ; D2.5@6.544,59.122 cw(c5.481,58.059) 6.985,58.059 cw(c8.489,58.059) D2.5@7.426,59.122 ; D2.5@6.724,59.302 cw(c6.094,58.672) 6.985,58.672 cw(c7.876,58.672) D2.5@7.246,59.302 ; D2.5@6.985,59.563 6.985,57.785 4.953,55.753 0.127,55.753 -1.778,53.848 -1.778,48.26 ATMEGA16/32.33@-0.381,46.863 ; D4.5@19.062,59.563 cw(c17.558,59.563) 18.621,58.499 cw(c19.685,57.436) D4.5@19.685,58.94 ; D4.5@19.316,59.563 cw(c18.425,59.563) 19.055,58.933 cw(c19.685,58.303) D4.5@19.685,59.194 ; D4.5@19.685,59.932 ccw(c19.685,60.823) 20.315,60.193 ccw(c20.945,59.563) D4.5@20.054,59.563 ; D4.5@19.685,60.186 ccw(c19.685,61.69) 20.749,60.627 ccw(c21.812,59.563) D4.5@20.308,59.563 ; D3.5@31.762,59.563 cw(c30.258,59.563) 31.321,58.499 cw(c32.385,57.436) D3.5@32.385,58.94 ; D3.5@32.016,59.563 cw(c31.125,59.563) 31.755,58.933 cw(c32.385,58.303) D3.5@32.385,59.194 ; D3.5@32.385,59.563 31.242,58.42 29.083,58.42 28.702,58.801 28.702,59.919 27.915,60.706 20.828,60.706 D4.5@19.685,59.563 13.132,53.01 0.94,53.01 PA0~PA7.8@-0.381,51.689 ATMEGA16/32.33@-0.381,46.863
GND: 10uf.2 ATMEGA16/32.11 C1.2 C2.1 GND.1 GND.2 GND.3 JP51.4 JP51.6 JP51.8 JP51.10 LED.2 PC4.2 PC5.2 PC6.2 PC7.2 PC7.3 POWER.2 RESET.0 RT.3 RT.4 | length 263.8
  Top Layer w0.6: C1.2@3.937,41.511 cw(c3.937,40.856) 4.4,41.32 cw(c4.864,41.783) C1.2@4.209,41.783 ; C1.2@3.937,41.783 5.08,40.64 10.922,40.64 C2.1@12.065,41.783 ; RESET.0@10.668,6.65 cw(c10.668,5.535) 11.457,6.323 cw(c12.245,7.112) RESET.0@11.13,7.112 ; RESET.0@10.668,7.112 13.208,4.572 18.694,4.572 22.047,7.925 28.143,7.925 GND.3@29.464,6.604 ; C2.1@11.793,41.783 cw(c11.138,41.783) 11.602,41.32 cw(c12.065,40.856) C2.1@12.065,41.511 ; GND.3@29.014,6.604 ccw(c27.928,6.604) 28.696,7.372 ccw(c29.464,8.14) GND.3@29.464,7.054 ; LED.2@29.591,17.145 31.115,17.145 PC7.2@39.243,25.273 ; LED.2@29.828,16.908 cw(c30.4,16.336) 30.4,17.145 cw(c30.4,17.954) LED.2@29.828,17.382 ; PC7.2@38.781,25.273 cw(c37.666,25.273) 38.454,24.484 cw(c39.243,23.696) PC7.2@39.243,24.811
  Bottom Layer w0.6: C1.2@3.745,41.591 cw(c3.282,41.128) 3.937,41.128 cw(c4.592,41.128) C1.2@4.129,41.591 ; C1.2@3.937,41.783 3.937,34.925 ATMEGA16/32.11@7.239,31.623 7.239,21.971 10uf.2@9.525,19.685 10uf.2@9.525,12.065 9.525,8.255 RESET.0@10.668,7.112 ; ATMEGA16/32.11@6.789,31.623 ccw(c5.703,31.623) 6.471,32.391 ccw(c7.239,33.159) ATMEGA16/32.11@7.239,32.073 ; ATMEGA16/32.11@6.921,31.305 cw(c6.153,30.537) 7.239,30.537 cw(c8.325,30.537) ATMEGA16/32.11@7.557,31.305 ; 10uf.2@9.19,19.685 ccw(c8.381,19.685) 8.953,20.257 ccw(c9.525,20.829) 10uf.2@9.525,20.02 ; 10uf.2@9.288,11.828 cw(c8.716,11.256) 9.525,11.256 cw(c10.334,11.256) 10uf.2@9.762,11.828 ; 10uf.2@9.288,12.302 ccw(c8.716,12.874) 9.525,12.874 ccw(c10.334,12.874) 10uf.2@9.762,12.302 ; 10uf.2@9.288,19.448 cw(c8.716,18.876) 9.525,18.876 cw(c10.334,18.876) 10uf.2@9.762,19.448 ; RESET.0@10.206,7.112 ccw(c9.091,7.112) 9.879,7.901 ccw(c10.668,8.689) RESET.0@10.668,7.574 ; GND.3@29.014,6.604 ccw(c27.928,6.604) 28.696,7.372 ccw(c29.464,8.14) GND.3@29.464,7.054 ; GND.1@29.146,1.842 ccw(c28.378,2.61) 29.464,2.61 ccw(c30.55,2.61) GND.1@29.782,1.842 ; GND.2@29.146,3.746 cw(c28.378,2.978) 29.464,2.978 cw(c30.55,2.978) GND.2@29.782,3.746 ; GND.2@29.146,4.382 ccw(c28.378,5.15) 29.464,5.15 ccw(c30.55,5.15) GND.2@29.782,4.382 ; GND.3@29.146,6.286 cw(c28.378,5.518) 29.464,5.518 cw(c30.55,5.518) GND.3@29.782,6.286 ; LED.2@29.256,17.145 cw(c28.447,17.145) 29.019,16.573 cw(c29.591,16.001) LED.2@29.591,16.81 ; GND.1@29.464,1.524 GND.2@29.464,4.064 GND.3@29.464,6.604 28.397,7.671 28.397,15.951 LED.2@29.591,17.145 ; PC5.2@39.116,43.099 cw(c39.116,41.984) 39.905,42.772 cw(c40.693,43.561) 39.578,43.561 cw(c40.693,43.561) 39.905,44.35 cw(c39.116,45.138) PC5.2@39.116,44.023 ; PC4.2@39.116,52.243 cw(c39.116,51.128) 39.905,51.916 cw(c40.693,52.705) 39.578,52.705 cw(c40.693,52.705) 39.905,53.494 cw(c39.116,54.282) PC4.2@39.116,53.167 ; PC7.2@39.243,25.735 ccw(c39.243,26.85) 40.032,26.062 ccw(c40.82,25.273) PC7.2@39.705,25.273 ; PC6.2@39.243,33.955 cw(c39.243,32.84) 40.032,33.628 cw(c40.82,34.417) 39.705,34.417 cw(c40.82,34.417) 40.032,35.206 cw(c39.243,35.994) PC6.2@39.243,34.879 ; PC7.2@39.57,24.946 cw(c40.358,24.158) 40.358,25.273 cw(c40.358,26.388) PC7.2@39.57,25.6 ; POWER.2@42.765,4.503 cw(c41.892,3.556) 43.18,3.556 ; RT.4@42.98,19.231 cw(c42.192,18.443) 43.307,18.443 cw(c44.422,18.443) RT.4@43.634,19.231 ; POWER.2@43.18,4.953 43.18,3.556 ; RT.4@43.307,19.558 43.307,17.653 42.545,16.891 35.052,16.891 33.401,15.24 33.401,3.683 34.925,2.159 41.783,2.159 43.18,3.556 ; JP51.10@43.497,64.071 cw(c42.729,63.303) 43.815,63.303 cw(c44.901,63.303) JP51.10@44.133,64.071 ; JP51.10@43.497,64.707 ccw(c42.729,65.475) 43.815,65.475 ccw(c44.901,65.475) JP51.10@44.133,64.707 ; JP51.8@43.497,66.611 cw(c42.729,65.843) 43.815,65.843 cw(c44.901,65.843) JP51.8@44.133,66.611 ; JP51.8@43.497,67.247 ccw(c42.729,68.015) 43.815,68.015 ccw(c44.901,68.015) JP51.8@44.133,67.247 ; JP51.6@43.497,69.151 cw(c42.729,68.383) 43.815,68.383 cw(c44.901,68.383) JP51.6@44.133,69.151 ; JP51.6@43.497,69.787 ccw(c42.729,70.555) 43.815,70.555 ccw(c44.901,70.555) JP51.6@44.133,69.787 ; JP51.4@43.497,71.691 cw(c42.729,70.923) 43.815,70.923 cw(c44.901,70.923) JP51.4@44.133,71.691 ; POWER.2@43.595,4.503 ccw(c44.468,3.556) 43.18,3.556 ; JP51.4@43.815,72.009 JP51.6@43.815,69.469 JP51.8@43.815,66.929 JP51.10@43.815,64.389 43.815,57.404 PC4.2@39.116,52.705 40.437,51.384 40.437,44.882 PC5.2@39.116,43.561 40.716,41.961 40.716,35.89 PC6.2@39.243,34.417 40.564,33.096 40.564,26.594 PC7.2@39.243,25.273 PC7.3@45.847,25.273 RT.3@45.847,19.558 ; RT.3@45.52,19.885 ccw(c44.732,20.673) 45.847,20.673 ccw(c46.962,20.673) RT.3@46.174,19.885 ; PC7.3@45.52,25.6 cw(c44.732,26.388) 44.732,25.273 cw(c44.732,24.158) 45.52,24.946 cw(c44.732,24.158) 45.847,24.158 cw(c46.962,24.158) PC7.3@46.174,24.946
MISO: ATMEGA16/32.7 JP51.9 PB0~PB7.2 R10.2 | length 98.2
  Bottom Layer w0.254: R10.2@-3.366,24.232 ccw(c-4.299,25.248) -2.92,25.248 ; PB0~PB7.2@-3.362,26.356 cw(c-4.425,25.293) -2.921,25.293 cw(c-1.417,25.293) PB0~PB7.2@-2.48,26.356 ; PB0~PB7.2@-3.362,27.238 ccw(c-4.425,28.301) -2.921,28.301 ccw(c-1.417,28.301) PB0~PB7.2@-2.48,27.238 ; ATMEGA16/32.7@-3.362,31.182 cw(c-4.425,30.119) -2.921,30.119 cw(c-1.417,30.119) ATMEGA16/32.7@-2.48,31.182 ; ATMEGA16/32.7@-3.362,32.064 ccw(c-4.425,33.127) -2.921,33.127 ccw(c-1.417,33.127) ATMEGA16/32.7@-2.48,32.064 ; R10.2@-3.195,24.045 ccw(c-3.768,24.67) -2.92,24.67 ccw(c-2.072,24.67) R10.2@-2.645,24.045 ; PB0~PB7.2@-3.182,26.536 cw(c-3.812,25.906) -2.921,25.906 cw(c-2.03,25.906) PB0~PB7.2@-2.66,26.536 ; PB0~PB7.2@-3.182,27.058 ccw(c-3.812,27.688) -2.921,27.688 ccw(c-2.03,27.688) PB0~PB7.2@-2.66,27.058 ; ATMEGA16/32.7@-3.182,31.362 cw(c-3.812,30.732) -2.921,30.732 cw(c-2.03,30.732) ATMEGA16/32.7@-2.66,31.362 ; ATMEGA16/32.7@-3.182,31.884 ccw(c-3.812,32.514) -2.921,32.514 ccw(c-2.03,32.514) ATMEGA16/32.7@-2.66,31.884 ; R10.2@-2.92,23.745 -2.92,25.248 ; R10.2@-2.473,24.232 cw(c-1.541,25.248) -2.92,25.248 ; JP51.9@40.652,64.389 cw(c39.148,64.389) 40.211,63.325 cw(c41.275,62.262) JP51.9@41.275,63.766 ; JP51.9@40.906,64.389 cw(c40.015,64.389) 40.645,63.759 cw(c41.275,63.129) JP51.9@41.275,64.02 ; JP51.9@41.275,64.389 34.061,57.175 34.061,50.902 31.166,48.006 29.489,48.006 28.702,47.219 28.702,46.101 27.686,45.085 0.686,45.085 -2.921,41.478 ATMEGA16/32.7@-2.921,31.623 PB0~PB7.2@-2.921,26.797 -2.921,25.249 -2.92,25.248
MOSI: ATMEGA16/32.6 JP51.1 PB0~PB7.3 R9.2 | length 115.9
  Top Layer w0.254: ATMEGA16/32.6@-5.461,31.623 0.711,37.795 39.243,37.795 40.386,38.938 40.386,59.47 39.636,60.22 39.636,72.91 JP51.1@41.275,74.549 ; ATMEGA16/32.6@-5.461,31.992 ccw(c-5.461,32.883) -4.831,32.253 ccw(c-4.201,31.623) ATMEGA16/32.6@-5.092,31.623 ; ATMEGA16/32.6@-5.461,32.246 ccw(c-5.461,33.75) -4.397,32.687 ccw(c-3.334,31.623) ATMEGA16/32.6@-4.838,31.623 ; JP51.1@40.652,74.549 cw(c39.148,74.549) 40.211,73.485 cw(c41.275,72.422) JP51.1@41.275,73.926 ; JP51.1@40.906,74.549 cw(c40.015,74.549) 40.645,73.919 cw(c41.275,73.289) JP51.1@41.275,74.18
  Bottom Layer w0.254: R9.2@-5.906,24.232 ccw(c-6.839,25.248) -5.46,25.248 ; PB0~PB7.3@-5.902,26.356 cw(c-6.965,25.293) -5.461,25.293 cw(c-3.957,25.293) PB0~PB7.3@-5.02,26.356 ; PB0~PB7.3@-5.902,27.238 ccw(c-6.965,28.301) -5.461,28.301 ccw(c-3.957,28.301) PB0~PB7.3@-5.02,27.238 ; ATMEGA16/32.6@-5.902,31.182 cw(c-6.965,30.119) -5.461,30.119 cw(c-3.957,30.119) ATMEGA16/32.6@-5.02,31.182 ; R9.2@-5.735,24.045 ccw(c-6.308,24.67) -5.46,24.67 ccw(c-4.612,24.67) R9.2@-5.185,24.045 ; PB0~PB7.3@-5.722,26.536 cw(c-6.352,25.906) -5.461,25.906 cw(c-4.57,25.906) PB0~PB7.3@-5.2,26.536 ; PB0~PB7.3@-5.722,27.058 ccw(c-6.352,27.688) -5.461,27.688 ccw(c-4.57,27.688) PB0~PB7.3@-5.2,27.058 ; ATMEGA16/32.6@-5.722,31.362 cw(c-6.352,30.732) -5.461,30.732 cw(c-4.57,30.732) ATMEGA16/32.6@-5.2,31.362 ; ATMEGA16/32.6@-5.461,31.623 PB0~PB7.3@-5.461,26.797 -5.461,25.249 -5.46,25.248 ; R9.2@-5.46,23.745 -5.46,25.248 ; R9.2@-5.013,24.232 cw(c-4.081,25.248) -5.46,25.248
Net1_0: ATMEGA16/32.26 PC4.0 PC7~PC0.5 | length 49.7
  Top Layer w0.254: PC7~PC0.5@21.458,51.828 cw(c21.511,50.258) 22.621,51.369 ; PC7~PC0.5@21.463,51.689 22.301,51.689 ; PC7~PC0.5@21.467,51.574 cw(c21.538,49.457) 23.035,50.955 ; PC7~PC0.5@21.475,51.32 cw(c21.564,48.656) 23.449,50.541 ; PC7~PC0.5@22.06,51.509 cw(c22.301,51.437) 22.301,51.689 ; PC7~PC0.5@22.06,51.869 ccw(c22.301,51.941) 22.301,51.689 ; PC4.0@38.481,57.785 cw(c36.948,57.785) 38.032,56.701 cw(c39.116,55.617) PC4.0@39.116,57.15 ; PC4.0@38.735,57.785 cw(c37.815,57.785) 38.466,57.135 cw(c39.116,56.484) PC4.0@39.116,57.404 ; PC4.0@39.116,57.785 32.766,51.435 32.766,50.546 23.444,50.546 22.301,51.689
  Bottom Layer w0.254: ATMEGA16/32.26@17.399,46.863 21.463,50.927 ; ATMEGA16/32.26@17.399,47.232 ccw(c17.399,48.123) 18.029,47.493 ccw(c18.659,46.863) ATMEGA16/32.26@17.768,46.863 ; ATMEGA16/32.26@17.399,47.486 ccw(c17.399,48.99) 18.463,47.927 ccw(c19.526,46.863) ATMEGA16/32.26@18.022,46.863 ; 19.861,49.325 ccw(c17.496,51.689) PC7~PC0.5@20.84,51.689 ; 20.294,49.758 ccw(c18.364,51.689) PC7~PC0.5@21.094,51.689 ; 20.728,50.192 ccw(c19.231,51.689) PC7~PC0.5@21.348,51.689 ; 21.161,50.625 ccw(c20.098,51.689) PC7~PC0.5@21.602,51.689 ; PC7~PC0.5@21.339,51.078 cw(c21.309,50.927) 21.463,50.927 ; PC7~PC0.5@21.463,51.689 21.463,50.927 ; PC7~PC0.5@21.587,51.078 ccw(c21.617,50.927) 21.463,50.927
Net2_0: ATMEGA16/32.27 PC5.0 PC7~PC0.6 | length 47.4
  Top Layer w0.254: PC7~PC0.6@18.923,51.066 cw(c18.923,49.562) 19.987,50.625 cw(c21.05,51.689) PC7~PC0.6@19.546,51.689 ; PC7~PC0.6@18.923,51.32 cw(c18.923,50.429) 19.553,51.059 cw(c20.183,51.689) PC7~PC0.6@19.292,51.689 ; PC7~PC0.6@18.923,51.689 21.971,48.641 PC5.0@39.116,48.641 ; PC5.0@38.667,48.192 ccw(c37.583,47.108) 37.583,48.641 ccw(c37.583,50.174) PC5.0@38.667,49.09 ; PC5.0@38.847,48.372 ccw(c38.196,47.721) 38.196,48.641 ccw(c38.196,49.561) PC5.0@38.847,48.91
  Bottom Layer w0.254: ATMEGA16/32.27@14.859,46.863 18.923,50.927 ; ATMEGA16/32.27@14.859,47.232 ccw(c14.859,48.123) 15.489,47.493 ccw(c16.119,46.863) ATMEGA16/32.27@15.228,46.863 ; ATMEGA16/32.27@14.859,47.486 ccw(c14.859,48.99) 15.923,47.927 ccw(c16.986,46.863) ATMEGA16/32.27@15.482,46.863 ; 17.321,49.325 ccw(c14.956,51.689) PC7~PC0.6@18.3,51.689 ; 17.754,49.758 ccw(c15.824,51.689) PC7~PC0.6@18.554,51.689 ; 18.188,50.192 ccw(c16.691,51.689) PC7~PC0.6@18.808,51.689 ; 18.621,50.625 ccw(c17.558,51.689) PC7~PC0.6@19.062,51.689 ; PC7~PC0.6@18.799,51.078 cw(c18.769,50.927) 18.923,50.927 ; PC7~PC0.6@18.923,51.689 18.923,50.927 ; PC7~PC0.6@19.047,51.078 ccw(c19.077,50.927) 18.923,50.927